# EAGLE board CT_schematic (EAGLE 7.6.0)

Size 100 x 80 mm. Coordinates in mm from the lower left corner, seen from the top.
Outline: 0,0 100,0 100,80 0,80 0,0
Copper layers (1*16): Top 0.035mm / dielectric 1.5mm / Bottom 0.035mm
Design rules "default": minimum track width 10mil, minimum drill 24mil, track to track 8mil, track to pad 8mil, pad to pad 8mil, via to via 8mil, smd to smd 8mil, copper to edge 40mil, drill to drill 8mil, minimum pad ring 10mil, minimum via ring 8mil, stop-mask expansion 4mil, vias tented up to drill 0mil, thermal gap 10mil

## Footprints (pad centres in the part's own frame; a part is rotated, then mirrored left to right if it is on the bottom)
C0603 = smd 0.8 x 0.8: 1 -0.762,0; 2 0.762,0
C0402 = smd 0.5 x 0.5: 1 -0.508,0; 2 0.508,0
C1206 = smd 1.3 x 1.6: 1 -1.524,0; 2 1.524,0
C1210 = smd 1.2 x 2.5: 1 -1.524,0; 2 1.524,0
EXV-9H = smd 3.505 x 1.676: 1 -2.857,0; 2 2.857,0
L0603 = smd 0.8 x 0.8: 1 -0.762,0; 2 0.762,0
PJ-037B_PACKAGE = drill 3.7 square: 1 12,0 | drill 3.2 square: 2 6,0
R0603 = smd 0.8 x 0.8: 1 -0.762,0; 2 0.762,0
LQFP144 = smd 0.35 x 1.35: 1 -8.75,-10.625; 2 -8.25,-10.625; 3 -7.75,-10.625; 4 -7.25,-10.625; 5 -6.75,-10.625; 6 -6.25,-10.625; 7 -5.75,-10.625; 8 -5.25,-10.625; 9 -4.75,-10.625; 10 -4.25,-10.625; 11 -3.75,-10.625; 12 -3.25,-10.625; 13 -2.75,-10.62; 14 -2.25,-10.625; 15 -1.75,-10.625; 16 -1.25,-10.625; 17 -0.75,-10.625; 18 -0.25,-10.625; 19 0.25,-10.625; 20 0.75,-10.625; 21 1.25,-10.625; 22 1.75,-10.625; 23 2.25,-10.625; 24 2.75,-10.62; 25 3.25,-10.625; 26 3.75,-10.625; 27 4.25,-10.625; 28 4.75,-10.625; 29 5.25,-10.625; 30 5.75,-10.625; 31 6.25,-10.625; 32 6.75,-10.625; 33 7.25,-10.625; 34 7.75,-10.625; 35 8.25,-10.625; 36 8.75,-10.625; 73 8.75,10.625; 74 8.25,10.625; 75 7.75,10.625; 76 7.25,10.625; 77 6.75,10.625; 78 6.25,10.625; 79 5.75,10.625; 80 5.25,10.625; 81 4.75,10.625; 82 4.25,10.625; 83 3.75,10.625; 84 3.25,10.625; 85 2.75,10.625; 86 2.25,10.625; 87 1.75,10.625; 88 1.25,10.625; 89 0.75,10.625; 90 0.25,10.625; 91 -0.25,10.625; 92 -0.75,10.625; 93 -1.25,10.625; 94 -1.75,10.625; 95 -2.25,10.625; 96 -2.75,10.625; 97 -3.25,10.625; 98 -3.75,10.625; 99 -4.25,10.625; 100 -4.75,10.625; 101 -5.25,10.625; 102 -5.75,10.625; 103 -6.25,10.625; 104 -6.75,10.625; 105 -7.25,10.625; 106 -7.75,10.625; 107 -8.25,10.625; 108 -8.75,10.625 | smd 1.35 x 0.35: 37 10.625,-8.75; 38 10.625,-8.25; 39 10.625,-7.75; 40 10.625,-7.25; 41 10.625,-6.75; 42 10.625,-6.25; 43 10.625,-5.75; 44 10.625,-5.25; 45 10.625,-4.75; 46 10.625,-4.25; 47 10.625,-3.75; 48 10.625,-3.25; 49 10.625,-2.75; 50 10.625,-2.25; 51 10.625,-1.75; 52 10.625,-1.25; 53 10.625,-0.75; 54 10.625,-0.25; 55 10.625,0.25; 56 10.625,0.75; 57 10.625,1.25; 58 10.625,1.75; 59 10.625,2.25; 60 10.625,2.75; 61 10.625,3.25; 62 10.625,3.75; 63 10.625,4.25; 64 10.625,4.75; 65 10.625,5.25; 66 10.625,5.75; 67 10.625,6.25; 68 10.625,6.75; 69 10.625,7.25; 70 10.625,7.75; 71 10.625,8.25; 72 10.625,8.75; 109 -10.625,8.75; 110 -10.625,8.25; 111 -10.625,7.75; 112 -10.625,7.25; 113 -10.625,6.75; 114 -10.625,6.25; 115 -10.625,5.75; 116 -10.625,5.25; 117 -10.625,4.75; 118 -10.625,4.25; 119 -10.625,3.75; 120 -10.625,3.25; 121 -10.625,2.75; 122 -10.625,2.25; 123 -10.625,1.75; 124 -10.625,1.25; 125 -10.625,0.75; 126 -10.625,0.25; 127 -10.625,-0.25; 128 -10.625,-0.75; 129 -10.625,-1.25; 130 -10.625,-1.75; 131 -10.625,-2.25; 132 -10.625,-2.75; 133 -10.625,-3.25; 134 -10.625,-3.75; 135 -10.625,-4.25; 136 -10.625,-4.75; 137 -10.625,-5.25; 138 -10.625,-5.75; 139 -10.625,-6.25; 140 -10.625,-6.75; 141 -10.625,-7.25; 142 -10.625,-7.75; 143 -10.625,-8.25; 144 -10.625,-8.75
WSON-6 = smd 0.4 x 0.6: 1 -1,-1.4; 2 0,-1.4; 3 1,-1.4; 4 1,1.4; 5 0,1.4; 6 -1,1.4 | drill 0.2 pad 0.3: P$1 0.95,0; P$2 -0.95,0; P$3 0,-0.5; P$4 0,0.5 | smd 2.4 x 1.5: PAD 0,0
TST-110-05-T-D-RA = drill 1 pad 1.7 square: 1 0,0 | drill 1 pad 1.7: 2 0,2.54; 3 2.54,0; 4 2.54,2.54; 5 5.08,0; 6 5.08,2.54; 7 7.62,0; 8 7.62,2.54; 9 10.16,0; 10 10.16,2.54; 11 12.7,0; 12 12.7,2.54; 13 15.24,0; 14 15.24,2.54; 15 17.78,0; 16 17.78,2.54; 17 20.32,0; 18 20.32,2.54; 19 22.86,0; 20 22.86,2.54
TDFN-8/6MM = smd 0.3 x 0.75: 1 0,0; 2 0.5,0; 3 1,0; 4 1.5,0; 5 1.5,3; 6 1,3; 7 0.5,3; 8 0,3
PC28F512P33BFD = smd 0.45 x 0.45: A1 0,0; A2 1,0; A3 2,0; A4 3,0; A5 4,0; A6 5,0; A7 6,0; A8 7,0; B1 0,-1; B2 1,-1; B3 2,-1; B4 3,-1; B5 4,-1; B6 5,-1; B7 6,-1; B8 7,-1; C1 0,-2; C2 1,-2; C3 2,-2; C4 3,-2; C5 4,-2; C6 5,-2; C7 6,-2; C8 7,-2; D1 0,-3; D2 1,-3; D3 2,-3; D4 3,-3; D5 4,-3; D6 5,-3; D7 6,-3; D8 7,-3; E1 0,-4; E2 1,-4; E3 2,-4; E4 3,-4; E5 4,-4; E6 5,-4; E7 6,-4; E8 7,-4; F1 0,-5; F2 1,-5; F3 2,-5; F4 3,-5; F5 4,-5; F6 5,-5; F7 6,-5; F8 7,-5; G1 0,-6; G2 1,-6; G3 2,-6; G4 3,-6; G5 4,-6; G6 5,-6; G7 6,-6; G8 7,-6; H1 0,-7; H2 1,-7; H3 2,-7; H4 3,-7; H5 4,-7; H6 5,-7; H7 6,-7; H8 7,-7
SSOP-28 = smd 1.5 x 0.4: 1 -3.625,4.225; 2 -3.625,3.575; 3 -3.625,2.925; 4 -3.625,2.275; 5 -3.625,1.625; 6 -3.625,0.975; 7 -3.625,0.325; 8 -3.625,-0.325; 9 -3.625,-0.975; 10 -3.625,-1.625; 11 -3.625,-2.275; 12 -3.625,-2.925; 13 -3.625,-3.575; 14 -3.625,-4.225; 15 3.625,-4.225; 16 3.625,-3.575; 17 3.625,-2.925; 18 3.625,-2.275; 19 3.625,-1.625; 20 3.625,-0.975; 21 3.625,-0.325; 22 3.625,0.325; 23 3.625,0.975; 24 3.625,1.625; 25 3.625,2.275; 26 3.625,2.925; 27 3.625,3.575; 28 3.625,4.225
HTSS-105-01-G-D = drill 1 pad 1.8 square: 1 0,0 | drill 1 pad 1.8: 2 0,2.54; 3 2.54,0; 4 2.54,2.54; 5 5.08,0; 6 5.08,2.54; 7 7.62,0; 8 7.62,2.54; 9 10.16,0; 10 10.16,2.54
ABS07-32.768KHZ-7-T = smd 1.1 x 2.4: 1 -2.5,0; 2 0,0
ASFL1 = smd 1.7 x 1.5: 1 -1.27,-1.1; 2 1.27,-1.1; 3 1.27,1.1; 4 -1.27,1.1
WSON-8 = smd 0.3 x 0.6: 1 -0.75,0; 2 0.05,0; 3 0.85,0; 4 1.65,0; 5 1.65,3.8; 6 0.85,3.8; 7 0.05,3.8; 8 -0.75,3.8 | smd 3 x 2.6: PAD 0.45,1.9
SON-6 = smd 0.55 x 0.3: 1 -0.355,0.5 | smd 0.52 x 0.3: 2 -0.37,0; 3 -0.37,-0.5; 4 0.37,-0.5; 5 0.37,0; 6 0.37,0.5
SW_4-1437565-2 = smd 1.4 x 2.1: 1 -2.23,4.55; 2 -2.23,-4.55; 3 2.23,4.55; 4 2.23,-4.55
LGM67K-G1J2-24-Z = smd 0.8 x 1.4: A -2,0; C 0,0
NC7SZ125M5X = smd 1.3 x 0.7: 1 -1.3,0.95; 2 -1.3,0; 3 -1.3,-0.95; 4 1.3,-0.95; 5 1.3,0.95

## Placement (x,y rotation side)
C1  1e-06  [C0603]  -66.04,67.31 0 top  (outside the outline)
C2  1e-07  [C0603]  -69.85,67.31 0 top  (outside the outline)
C3  1e-07  [C0603]  -73.66,67.31 0 top  (outside the outline)
C4  1e-07  [C0603]  -77.47,67.31 0 top  (outside the outline)
C5  1e-07  [C0603]  -15.24,72.39 0 top  (outside the outline)
C6  1e-07  [C0603]  -19.05,72.39 0 top  (outside the outline)
C7  1e-07  [C0603]  -22.86,72.39 0 top  (outside the outline)
C8  1e-07  [C0603]  -26.67,72.39 0 top  (outside the outline)
C9  1e-07  [C0603]  -30.48,72.39 0 top  (outside the outline)
C10  1e-07  [C0603]  -34.29,72.39 0 top  (outside the outline)
C11  1e-07  [C0603]  -38.1,72.39 0 top  (outside the outline)
C12  1e-07  [C0603]  -41.91,72.39 0 top  (outside the outline)
C13  1e-07  [C0603]  -45.72,72.39 0 top  (outside the outline)
C14  4.7e-06  [C0603]  -54.61,67.31 0 top  (outside the outline)
C15  2.2e-06  [C0603]  -58.42,67.31 0 top  (outside the outline)
C16  2.2e-06  [C0603]  -62.23,67.31 0 top  (outside the outline)
C17  1e-08  [C0603]  -49.53,72.39 0 top  (outside the outline)
C18  1e-06  [C0603]  -53.34,72.39 0 top  (outside the outline)
C19  1e-07  [C0603]  -57.15,72.39 0 top  (outside the outline)
C20  1e-11  [C0402]  -45.72,77.47 0 top  (outside the outline)
C21  1e-11  [C0402]  -49.53,77.47 0 top  (outside the outline)
C22  1e-08  [C0402]  -53.34,77.47 0 top  (outside the outline)
C23  1e-07  [C0402]  -57.15,77.47 0 top  (outside the outline)
C24  1e-07  [C0402]  -60.96,77.47 0 top  (outside the outline)
C25  1e-08  [C0402]  -64.77,77.47 0 top  (outside the outline)
C26  1e-08  [C0402]  -68.58,77.47 0 top  (outside the outline)
C27  1e-07  [C0402]  -72.39,77.47 0 top  (outside the outline)
C28  1e-08  [C0402]  -76.2,77.47 0 top  (outside the outline)
C29  1e-07  [C0402]  -15.24,82.55 0 top  (outside the outline)
C30  1e-08  [C0402]  -19.05,82.55 0 top  (outside the outline)
C31  1e-07  [C0402]  -22.86,82.55 0 top  (outside the outline)
C32  1e-08  [C0402]  -26.67,82.55 0 top  (outside the outline)
C33  1e-07  [C0402]  -30.48,82.55 0 top  (outside the outline)
C34  1e-07  [C0402]  -34.29,82.55 0 top  (outside the outline)
C35  1e-07  [C0402]  -38.1,82.55 0 top  (outside the outline)
C36  1e-07  [C0402]  -41.91,82.55 0 top  (outside the outline)
C37  1e-07  [C0402]  -45.72,82.55 0 top  (outside the outline)
C38  1e-08  [C0402]  -49.53,82.55 0 top  (outside the outline)
C39  1e-08  [C0402]  -53.34,82.55 0 top  (outside the outline)
C40  1e-05  [C1206]  -54.61,54.61 0 top  (outside the outline)
C41  1e-05  [C1210]  -48.26,55.88 0 top  (outside the outline)
C42  1e-07  [C0402]  -57.15,82.55 0 top  (outside the outline)
C43  0.0001  [EXV-9H]  -60.96,48.26 0 top  (outside the outline)
C44  0.0001  [EXV-9H]  -72.39,48.26 0 top  (outside the outline)
C45  1e-08  [C0402]  -60.96,82.55 0 top  (outside the outline)
C46  1e-08  [C0402]  -64.77,82.55 0 top  (outside the outline)
C47  1e-08  [C0402]  -68.58,82.55 0 top  (outside the outline)
F1  240.0  [L0603]  -60.96,72.39 0 top  (outside the outline)
J1  PJ-037B  [PJ-037B_PACKAGE]  -62.23,7.62 0 top  (outside the outline)
R2  1000.0  [R0603]  -64.77,72.39 0 top  (outside the outline)
R4  4700.0  [R0603]  -68.58,72.39 0 top  (outside the outline)
R5  4700.0  [R0603]  -72.39,72.39 0 top  (outside the outline)
R6  2200.0  [R0603]  -76.2,72.39 0 top  (outside the outline)
R7  2200.0  [R0603]  -15.24,77.47 0 top  (outside the outline)
R8  2200.0  [R0603]  -19.05,77.47 0 top  (outside the outline)
R9  2200.0  [R0603]  -22.86,77.47 0 top  (outside the outline)
R10  2200.0  [R0603]  -26.67,77.47 0 top  (outside the outline)
R11  2200.0  [R0603]  -30.48,77.47 0 top  (outside the outline)
R12  10000.0  [R0603]  -30.48,62.23 0 top  (outside the outline)
R13  10000.0  [R0603]  -35.56,62.23 0 top  (outside the outline)
R14  10000.0  [R0603]  -40.64,62.23 0 top  (outside the outline)
R15  10000.0  [R0603]  -45.72,62.23 0 top  (outside the outline)
R16  10000.0  [R0603]  -50.8,62.23 0 top  (outside the outline)
R17  10000.0  [R0603]  -55.88,62.23 0 top  (outside the outline)
R18  10000.0  [R0603]  -60.96,62.23 0 top  (outside the outline)
R19  10000.0  [R0603]  -66.04,62.23 0 top  (outside the outline)
R20  10000.0  [R0603]  -71.12,62.23 0 top  (outside the outline)
R21  10000.0  [R0603]  -76.2,62.23 0 top  (outside the outline)
R22  10000.0  [R0603]  -15.24,67.31 0 top  (outside the outline)
R23  10000.0  [R0603]  -20.32,67.31 0 top  (outside the outline)
R24  10000.0  [R0603]  -25.4,67.31 0 top  (outside the outline)
R25  10000.0  [R0603]  -30.48,67.31 0 top  (outside the outline)
R26  10000.0  [R0603]  -35.56,67.31 0 top  (outside the outline)
R27  10000.0  [R0603]  -40.64,67.31 0 top  (outside the outline)
R28  100000.0  [R0603]  -78.74,54.61 0 top  (outside the outline)
R29  100000.0  [R0603]  -15.24,62.23 0 top  (outside the outline)
R30  2231.0  [R0603]  -34.29,77.47 0 top  (outside the outline)
R31  1000.0  [R0603]  -38.1,77.47 0 top  (outside the outline)
R32  10000.0  [R0603]  -45.72,67.31 0 top  (outside the outline)
R33  10000.0  [R0603]  -50.8,67.31 0 top  (outside the outline)
R34  9100.0  [R0603]  -41.91,77.47 0 top  (outside the outline)
R35  680000.0  [R0603]  -20.32,62.23 0 top  (outside the outline)
R36  120000.0  [R0603]  -25.4,62.23 0 top  (outside the outline)
U1  STM32F446ZCT6  [LQFP144]  -24.13,11.43 0 top  (outside the outline)
U2  HDC1080DMBR  [WSON-6]  -52.07,48.26 0 top  (outside the outline)
U3  TST-110-05-T-D-RA  [TST-110-05-T-D-RA]  -46.99,45.72 0 top  (outside the outline)
U4  24AA01T-I/MNY  [TDFN-8/6MM]  -62.23,26.67 0 top  (outside the outline)
U5  24AA64T-I/MNY  [TDFN-8/6MM]  -76.2,26.67 0 top  (outside the outline)
U6  PC28F512P33BFD  [PC28F512P33BFD]  -78.74,10.16 0 top  (outside the outline)
U7  ST3241EBPR  [SSOP-28]  -41.91,7.62 0 top  (outside the outline)
U8  HTSS-105-01-G-D  [HTSS-105-01-G-D]  -46.99,26.67 0 top  (outside the outline)
U9  ABS07-32.768KHZ-7-T  [ABS07-32.768KHZ-7-T]  -27.94,55.88 0 top  (outside the outline)
U10  ASFL1-25MHZ-NCS  [ASFL1]  -46.99,39.37 0 top  (outside the outline)
U11  LP3878SDX-ADJ/NOPB  [WSON-8]  -30.48,38.1 0 top  (outside the outline)
U12  TPS3895ADRYR  [SON-6]  -71.12,81.28 0 top  (outside the outline)
U13  4-1437565-2  [SW_4-1437565-2]  -27.94,29.21 0 top  (outside the outline)
U14  Q65110A2395  [LGM67K-G1J2-24-Z]  -36.83,55.88 0 top  (outside the outline)
U15  nc7sz125m5x  [NC7SZ125M5X]  -59.69,54.61 0 top  (outside the outline)
U16  nc7sz125m5x  [NC7SZ125M5X]  -66.04,54.61 0 top  (outside the outline)
U17  nc7sz125m5x  [NC7SZ125M5X]  -72.39,54.61 0 top  (outside the outline)

## Library data of the parts
C1-C47 F1 J1 R2 R4-R36 U1-U17 = circuit_tree

## Nets
CLK_CRYSTAL_U1_8: C20.1 U1.8 U9.1
CLK_CRYSTAL_U1_9: C21.1 U1.9 U9.2
CLK_U1_23: U1.23 U10.3
GND: C1.2 C2.2 C3.2 C4.2 C5.2 C6.2 C7.2 C8.2 C9.2 C10.2 C11.2 C12.2 C13.2 C14.2 C15.2 C16.2 C17.2 C18.2 C19.2 C20.2 C21.2 C22.2 C23.2 C24.2 C25.2 C26.2 C27.2 C28.2 C29.2 C30.2 C31.2 C32.2 C33.2 C36.2 C37.2 C38.2 C39.2 C40.2 C41.2 C42.2 C43.2 C44.2 C45.2 C46.2 C47.2 J1.2 R2.2 R12.2 R19.2 R20.2 R21.2 R31.2 R34.2 R36.2 U1.16 U1.31 U1.38 U1.51 U1.61 U1.83 U1.94 U1.107 U1.120 U1.130 U2.2 U2.PAD U3.4 U3.6 U3.8 U3.10 U3.12 U3.14 U3.16 U3.18 U3.20 U4.4 U5.4 U5.7 U6.B2 U6.H2 U6.H4 U6.H6 U7.23 U7.25 U8.9 U10.2 U11.3 U11.PAD U12.2 U14.C U15.2 U15.3 U16.1 U16.3 U17.1 U17.3
NET_U1_25: R5.1 U1.25 U17.4
NET_U1_33: C17.1 C18.1 F1.1 U1.32 U1.33
NET_U1_69: R8.1 U1.69 U5.6
NET_U1_70: R9.1 U1.70 U5.5
NET_U1_71: C15.1 U1.71
NET_U1_99: R11.1 U1.99 U4.5
NET_U1_100: R10.1 U1.100 U4.6
NET_U1_106: C16.1 U1.106
NET_U1_136: R6.1 U1.136 U2.6
NET_U1_138: R12.1 U1.138
NET_U1_140: R7.1 U1.140 U2.1
NET_U1_141: U14.A
NET_U1_142: U13.3 U13.4
NET_U1_143: R13.1 U1.143
NET_U3_19: R19.1 U3.19
NET_U5_1: R20.1 U5.1
NET_U5_2: R21.1 U5.2
NET_U5_3: R22.1 U5.3
NET_U6_A4: C31.1 C32.1 U6.A4
NET_U6_C6: R26.1 U6.C6
NET_U6_D4: R4.1 U6.D4 U16.4
NET_U7_1: C35.1 U7.1
NET_U7_2: C35.2 U7.2
NET_U7_3: C37.1 U7.3
NET_U7_22: R28.1 U7.22
NET_U7_24: C34.2 U7.24
NET_U7_27: C36.1 U7.27
NET_U7_28: C34.1 U7.28
NET_U8_3: U7.4 U8.3
NET_U8_4: U7.5 U8.4
NET_U8_5: U7.9 U8.5
NET_U8_6: U7.10 U8.6
NET_U11_1: C39.1 U11.1
NET_U11_6: R30.2 R31.1 U11.6
NET_U11_8: R29.1 U11.8
NET_U12_1: R33.1 R34.1 U12.1
NET_U12_3: R35.2 R36.1 U12.3
NET_U12_4: R32.1 U12.4 U15.4 U16.2 U17.2
NET_U13_1: R2.1 U13.1 U13.2
PROC_FMC_A0: U1.10 U6.A1
PROC_FMC_A1: U1.11 U6.B1
PROC_FMC_A2: U1.12 U6.C1
PROC_FMC_A3: U1.13 U6.D1
PROC_FMC_A4: U1.14 U6.D2
PROC_FMC_A5: U1.15 U6.A2
PROC_FMC_A6: U1.50 U6.C2
PROC_FMC_A7: U1.53 U6.A3
PROC_FMC_A8: U1.54 U6.B3
PROC_FMC_A9: U1.55 U6.C3
PROC_FMC_A10: U1.56 U6.D3
PROC_FMC_A11: U1.57 U6.C4
PROC_FMC_A12: U1.87 U6.A5
PROC_FMC_A13: U1.88 U6.B5
PROC_FMC_A14: U1.89 U6.C5
PROC_FMC_A15: U1.90 U6.D7
PROC_FMC_A16: U1.80 U6.D8
PROC_FMC_A17: U1.81 U6.A7
PROC_FMC_A18: U1.82 U6.B7
PROC_FMC_A19: U1.2 U6.C7
PROC_FMC_A20: U1.3 U6.C8
PROC_FMC_A21: U1.4 U6.A8
PROC_FMC_A22: U1.5 U6.G1
PROC_FMC_A23: U1.1 U6.H8
PROC_FMC_A24: U1.128 U6.B6
PROC_FMC_CLK: U1.117 U6.E6
PROC_FMC_D0: U1.85 U6.F2
PROC_FMC_D1: U1.86 U6.E2
PROC_FMC_D2: U1.114 U6.G3
PROC_FMC_D3: U1.115 U6.E4
PROC_FMC_D4: U1.58 U6.E5
PROC_FMC_D5: U1.59 U6.G5
PROC_FMC_D6: U1.60 U6.G6
PROC_FMC_D7: U1.63 U6.H7
PROC_FMC_D8: U1.64 U6.E1
PROC_FMC_D9: U1.65 U6.E3
PROC_FMC_D10: U1.66 U6.F3
PROC_FMC_D11: U1.67 U6.F4
PROC_FMC_D12: U1.68 U6.F5
PROC_FMC_D13: U1.77 U6.H5
PROC_FMC_D14: U1.78 U6.G7
PROC_FMC_D15: U1.79 U6.E7
PROC_FMC_NE2: R24.1 U1.124 U6.B4
PROC_FMC_NL: R23.1 U1.137 U6.F6
PROC_FMC_NOE: R25.1 U1.118 U6.F8
PROC_FMC_NWAIT: U1.122 U6.F7
PROC_FMC_NWE: R27.1 U1.119 U6.G8
PROC_SYS_JTCK_SWCLK: R17.1 U1.109 U3.9
PROC_SYS_JTDI: R15.1 U1.110 U3.5
PROC_SYS_JTDO_SWO: U1.133 U3.13
PROC_SYS_JTMS_SWDIO: R16.1 U1.105 U3.7
PROC_SYS_JTRST: R14.1 U1.134 U3.3
PROC_USART1_CTS: U7.13
PROC_USART1_RTS: U7.18
PROC_USART1_RX: U7.19
PROC_USART1_TX: U7.14
RST_OUT_U3_SRESET_B: R18.1 U3.15 U15.1
VCC_S1_7V8: C40.1 C43.1 C44.1 J1.1 R29.2 U11.4
VCC_TIER1_3V3: C1.1 C2.1 C3.1 C4.1 C5.1 C6.1 C7.1 C8.1 C9.1 C10.1 C11.1 C12.1 C13.1 C14.1 C19.1 C22.1 C23.1 C24.1 C25.1 C26.1 C27.1 C28.1 C29.1 C30.1 C33.1 C38.1 C41.1 C42.1 C45.1 C46.1 C47.1 F1.2 R4.2 R5.2 R6.2 R7.2 R8.2 R9.2 R10.2 R11.2 R13.2 R14.2 R15.2 R16.2 R17.2 R18.2 R22.2 R23.2 R24.2 R25.2 R26.2 R27.2 R28.2 R30.1 R32.2 R33.2 R35.1 U1.6 U1.17 U1.30 U1.39 U1.52 U1.62 U1.72 U1.84 U1.95 U1.108 U1.121 U1.131 U1.144 U2.5 U3.1 U3.2 U4.7 U4.8 U5.8 U6.A6 U6.D5 U6.D6 U6.G4 U6.H3 U7.26 U10.4 U11.5 U12.6 U15.5 U16.5 U17.5

## Tracks (layer width: path | path; a pad name or v marks a point on that pad's centre or on a via)
CLK_CRYSTAL_U1_8  (2 unrouted)
CLK_CRYSTAL_U1_9  (2 unrouted)
CLK_U1_23  (1 unrouted)
GND  (95 unrouted)
NET_U1_25  (2 unrouted)
NET_U1_33  (4 unrouted)
NET_U1_69  (2 unrouted)
NET_U1_70  (2 unrouted)
NET_U1_71  (1 unrouted)
NET_U1_99  (2 unrouted)
NET_U1_100  (2 unrouted)
NET_U1_106  (1 unrouted)
NET_U1_136  (2 unrouted)
NET_U1_138  (1 unrouted)
NET_U1_140  (2 unrouted)
NET_U1_142  (1 unrouted)
NET_U1_143  (1 unrouted)
NET_U3_19  (1 unrouted)
NET_U5_1  (1 unrouted)
NET_U5_2  (1 unrouted)
NET_U5_3  (1 unrouted)
NET_U6_A4  (2 unrouted)
NET_U6_C6  (1 unrouted)
NET_U6_D4  (2 unrouted)
NET_U7_1  (1 unrouted)
NET_U7_2  (1 unrouted)
NET_U7_3  (1 unrouted)
NET_U7_22  (1 unrouted)
NET_U7_24  (1 unrouted)
NET_U7_27  (1 unrouted)
NET_U7_28  (1 unrouted)
NET_U8_3  (1 unrouted)
NET_U8_4  (1 unrouted)
NET_U8_5  (1 unrouted)
NET_U8_6  (1 unrouted)
NET_U11_1  (1 unrouted)
NET_U11_6  (2 unrouted)
NET_U11_8  (1 unrouted)
NET_U12_1  (2 unrouted)
NET_U12_3  (2 unrouted)
NET_U12_4  (4 unrouted)
NET_U13_1  (2 unrouted)
PROC_FMC_A0  (1 unrouted)
PROC_FMC_A1  (1 unrouted)
PROC_FMC_A2  (1 unrouted)
PROC_FMC_A3  (1 unrouted)
PROC_FMC_A4  (1 unrouted)
PROC_FMC_A5  (1 unrouted)
PROC_FMC_A6  (1 unrouted)
PROC_FMC_A7  (1 unrouted)
PROC_FMC_A8  (1 unrouted)
PROC_FMC_A9  (1 unrouted)
PROC_FMC_A10  (1 unrouted)
PROC_FMC_A11  (1 unrouted)
PROC_FMC_A12  (1 unrouted)
PROC_FMC_A13  (1 unrouted)
PROC_FMC_A14  (1 unrouted)
PROC_FMC_A15  (1 unrouted)
PROC_FMC_A16  (1 unrouted)
PROC_FMC_A17  (1 unrouted)
PROC_FMC_A18  (1 unrouted)
PROC_FMC_A19  (1 unrouted)
PROC_FMC_A20  (1 unrouted)
PROC_FMC_A21  (1 unrouted)
PROC_FMC_A22  (1 unrouted)
PROC_FMC_A23  (1 unrouted)
PROC_FMC_A24  (1 unrouted)
PROC_FMC_CLK  (1 unrouted)
PROC_FMC_D0  (1 unrouted)
PROC_FMC_D1  (1 unrouted)
PROC_FMC_D2  (1 unrouted)
PROC_FMC_D3  (1 unrouted)
PROC_FMC_D4  (1 unrouted)
PROC_FMC_D5  (1 unrouted)
PROC_FMC_D6  (1 unrouted)
PROC_FMC_D7  (1 unrouted)
PROC_FMC_D8  (1 unrouted)
PROC_FMC_D9  (1 unrouted)
PROC_FMC_D10  (1 unrouted)
PROC_FMC_D11  (1 unrouted)
PROC_FMC_D12  (1 unrouted)
PROC_FMC_D13  (1 unrouted)
PROC_FMC_D14  (1 unrouted)
PROC_FMC_D15  (1 unrouted)
PROC_FMC_NE2  (2 unrouted)
PROC_FMC_NL  (2 unrouted)
PROC_FMC_NOE  (2 unrouted)
PROC_FMC_NWAIT  (1 unrouted)
PROC_FMC_NWE  (2 unrouted)
PROC_SYS_JTCK_SWCLK  (2 unrouted)
PROC_SYS_JTDI  (2 unrouted)
PROC_SYS_JTDO_SWO  (1 unrouted)
PROC_SYS_JTMS_SWDIO  (2 unrouted)
PROC_SYS_JTRST  (2 unrouted)
RST_OUT_U3_SRESET_B  (2 unrouted)
VCC_S1_7V8  (5 unrouted)
VCC_TIER1_3V3  (87 unrouted)